# Altium PCB gauntlet1.PcbDoc
Units mil, origin at the board's own origin, x right, y up, seen from the top; angles counter-clockwise.
Board outline 2555 x 1490 mil, 2 copper layers (Top Layer, Bottom Layer); 35 components, 37 nets, 144 pads, 42 vias.
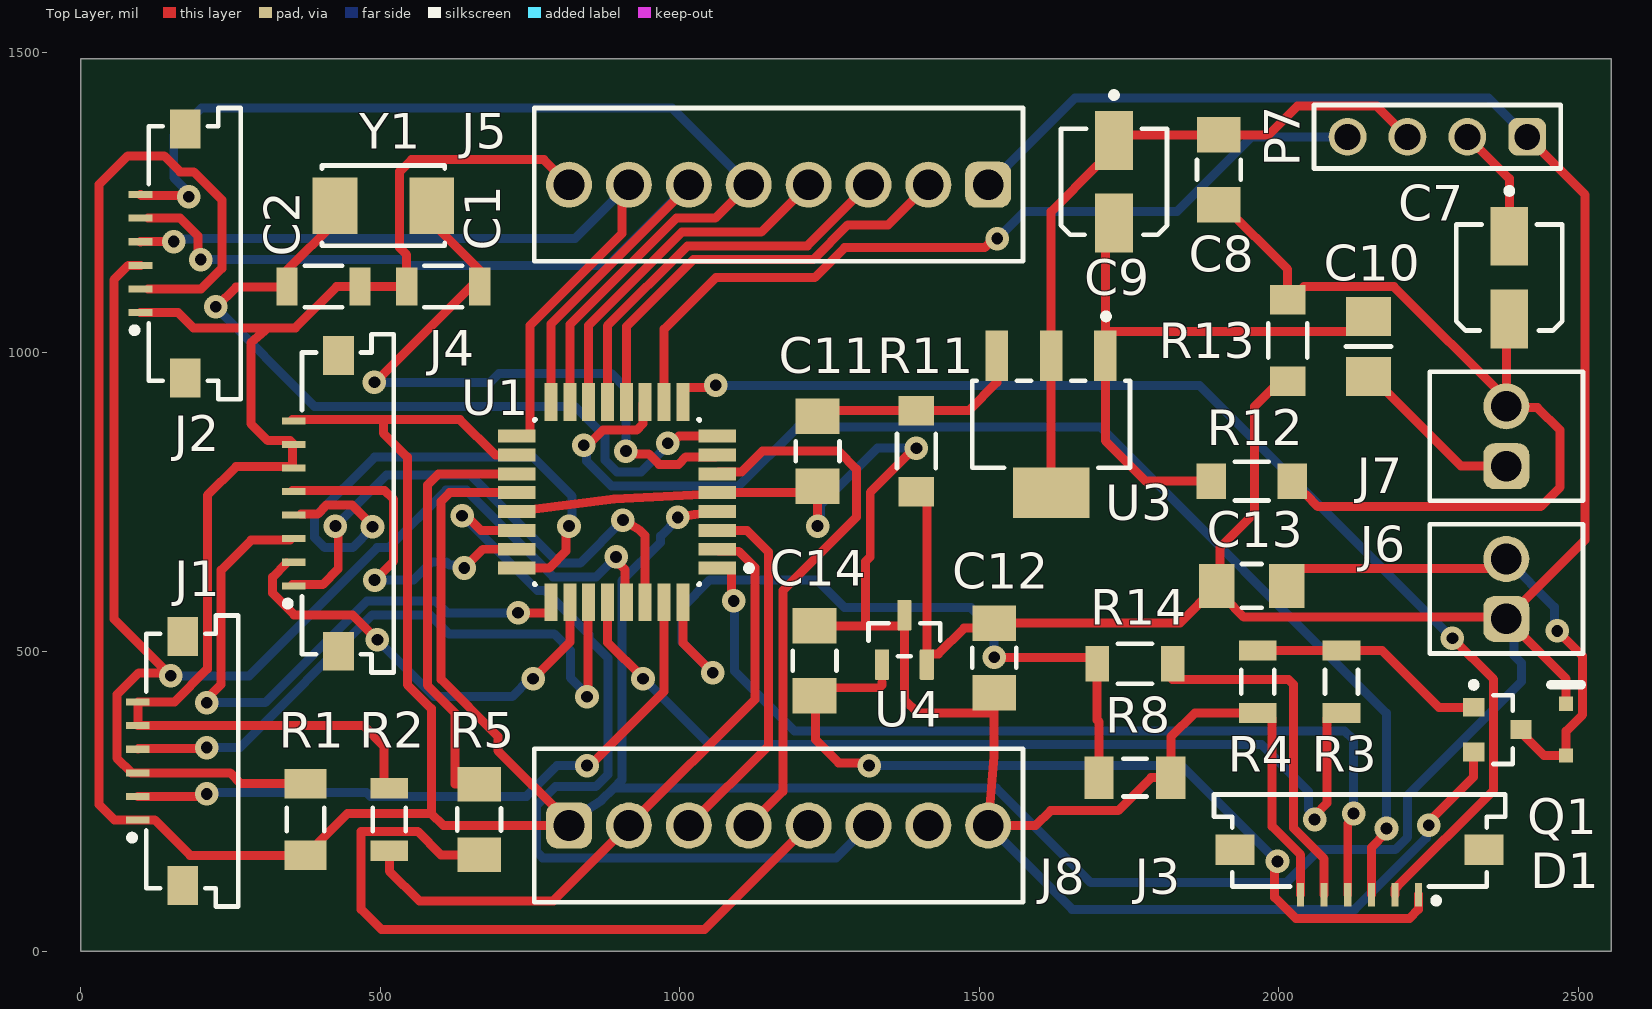
[diagram p0: Top Layer view]
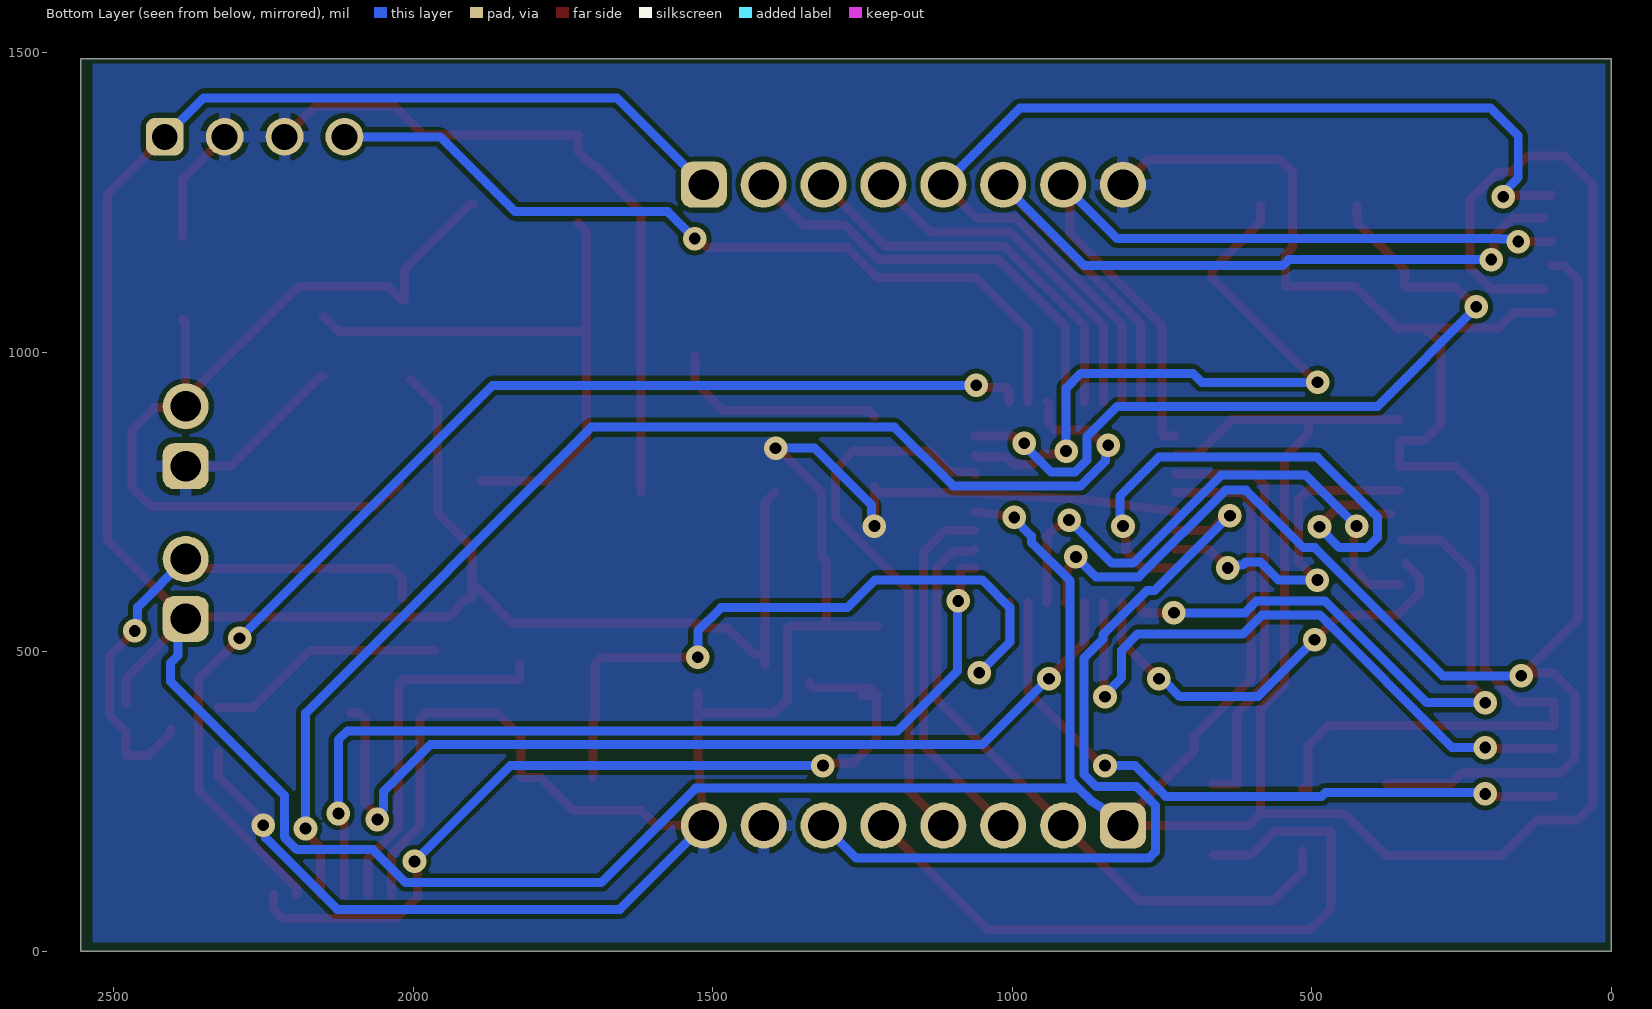
[diagram p1: Bottom Layer view, seen from below]
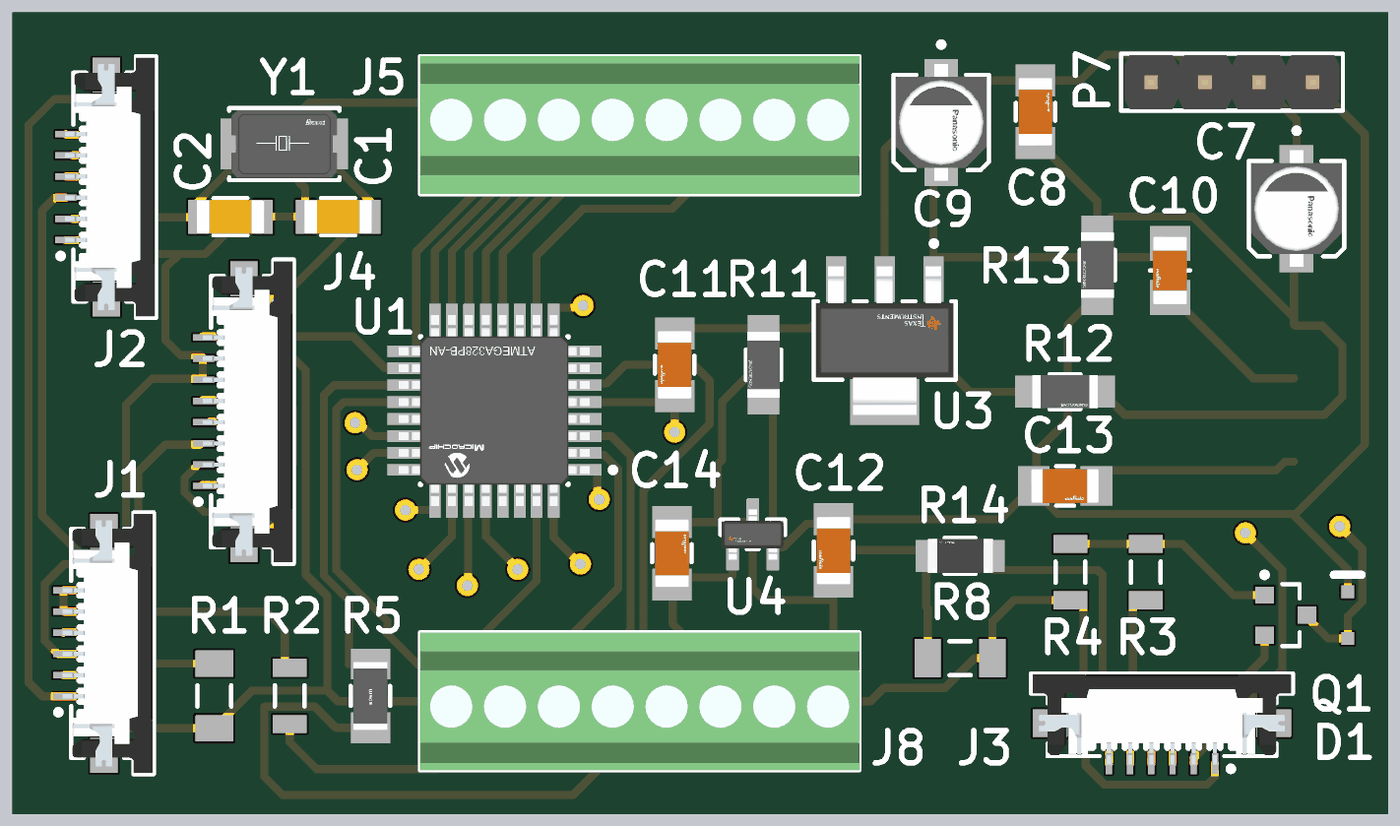
[diagram p2: 3D render of the assembled board from above, using the file's embedded part models]

## Layer stack, top to bottom
Top Solder: solder mask 0.4, Solder Resist, Dk 3.5
Top Layer: signal copper 1.4
Dielectric 1: dielectric 12.6, FR-4, Dk 4.8
Bottom Layer: signal copper 1.4
Bottom Solder: solder mask 0.4, Solder Resist, Dk 3.5

## Board outline
0,0 2555,0 2555,1490 0,1490

## Design rules (kind name [scope] priority, off if disabled: settings)
BoardOutlineClearance [All] p1: gap=7.87 ignorepadtopadclearanceinfootprint=FALSE except(15.75: Arc-SplitBarrior Arc-SplitContinuation Track-SplitBarrior Track-SplitContinuation SMDPad-SplitBarrior SMDPad-SplitContinuation THPad-SplitBarrior THPad-SplitContinuation Via-SplitBarrior Via-SplitContinuation Fill-SplitBarrior Fill-SplitContinuation Poly-SplitBarrior Poly-SplitContinuation Region-SplitBarrior Region-SplitContinuation Text-SplitBarrior Text-SplitContinuation)
Clearance "Clearance Bottom Layer" [OnLayer('Bottom Layer')] p1: gap=8 ignorepadtopadclearanceinfootprint=TRUE except(10: Arc-Text Track-Text SMDPad-Text THPad-Text Via-Text Fill-Text Poly-Text Region-Text Text-Text)
Clearance "Clearance Top Layer" [OnLayer('Top Layer')] p2: gap=8 ignorepadtopadclearanceinfootprint=TRUE except(10: Arc-Text Track-Text SMDPad-Text THPad-Text Via-Text Fill-Text Poly-Text Region-Text Text-Text)
Clearance [All] p3: gap=7.87 ignorepadtopadclearanceinfootprint=FALSE except(3.5: Arc-Arc Arc-Track Arc-SMDPad Track-Track Track-SMDPad SMDPad-SMDPad; 5: Arc-Via Track-Via SMDPad-Via THPad-Via Via-Via; 10: Arc-Text Track-Text SMDPad-Text THPad-Text Via-Text Fill-Text Poly-Text Region-Text Text-Text)
HoleSize [All] p1: absolutevalues=TRUE maxlimit=248.03 minlimit=7.87 maxpercent=80.000 minpercent=20.000
MinimumAnnularRing [All] p1: minimumring=3
MinimumSolderMaskSliver [All] p1: minsoldermaskwidth=3.94
PolygonConnect PolygonConnect_1 [All] p1: thpad.connectstyle=Relief thpad.reliefconductorwidth=20 thpad.reliefentries=4 thpad.polygonreliefangle="90 Angle" thpad.airgapwidth=10 smdpad.connectstyle=Relief smdpad.reliefconductorwidth=20 smdpad.reliefentries=4 smdpad.polygonreliefangle="90 Angle" smdpad.airgapwidth=10 via.connectstyle=Direct via.reliefconductorwidth=20 via.reliefentries=4 via.polygonreliefangle="90 Angle" via.airgapwidth=10
RoutingCorners [All] p1: cornerstyle=Round minsetback=100 maxsetback=100
RoutingVias [All] p1: holewidth=19.68 width=39.37 viastyle="Through Hole" minholewidth=7.87 minwidth=17.72 maxholewidth=39.37 maxwidth=78.74
SilkToSilkClearance [All] p1: silktosilkclearance=3.94
SilkToSolderMaskClearance [IsPad] p1: minsilkscreentomaskgap=3.94 clearancetoexposedcopper=TRUE
SolderMaskExpansion [All] p1: expansion=4 istentingtop=FALSE
Width [All] p1: maxlimit=100 minlimit=3.5 preferedwidth=15
25 further rules are at their usual default settings.

## Components (designator, comment, footprint, x,y, rotation, side; value= is the part's Value field where it differs from the comment)
C1 "22pF" WCAP-CSGP_1206_L3.2W1.6H0.8 605,1110 r180 top
C2 "22pF" WCAP-CSGP_1206_L3.2W1.6H0.8 405,1110 r180 top
C7 "10 uF" FP-FTB-MFG 2385,1125 r270 top
C8 "0.1uF" FP-GRM31M-0_15-IPC_A 1900,1305 r90 top
C9 "10 uF" FP-FTB-MFG 1725,1285 r270 top
C10 "3.3uF" FP-GCG31C-0_3-IPC_B 2150,1010 r270 top
C11 "0.1uF" FP-GRM31M-0_15-IPC_A 1230,835 r270 top
C12 "0.1uF" FP-GRM31M-0_15-IPC_A 1525,490 r270 top
C13 "0.1uF" FP-GRM31M-0_15-IPC_A 1955,610 r0 top
C14 "0.1uF" FP-GRM31M-0_15-IPC_A 1225,485 r90 top
D1 "1N4148WS-E3-08" VISH-SOD-323-2_V 2480,370 r90 top
J1 "Character Select" 686106183422 185.75,317.68 r90 top
J2 "Programming" 686106183422 190,1165 r90 top
J3 "Communications" 686106183422 2135,185 r180 top
J4 "686108183422" 686108183422 445.75,747.95 r90 top
J5 "691210910008" 691210910008 1165,1280 r180 top
J6 "Haptic" 691210910002 -47620,50605 r90 top
J7 "BAT" 691210910002 -47620,50860 r90 top
J8 "" 691210910008 1165,210 r0 top
P7 "NeoPixel Stick" 61300411121 2265,1360 r180 top
Q1 "MMBTA42LT1G" ONSC-SOT-23-3-318-08_V 2365,370 r0 top
R1 "10k" RESC3116X65X40ML10T20 375,220 r90 top
R2 "" RESC3116X65X40LL10T20 515,220 r270 top
R3 "2k" RESC3116X65X40LL10T20 2105,450 r270 top
R4 "2k" RESC3116X65X40LL10T20 1965,450 r90 top
R5 "KTR18EZPJ102" FP-KTR18-IPC_A 665,220 r90 top
R8 "10k" RESC3116X65X40ML10T20 1760,290 r180 top
R11 "0Ω" FP-CR1206-MFG 1395,835 r270 top
R12 "0Ω" FP-CR1206-MFG 1955,785 r0 top
R13 "0Ω" FP-CR1206-MFG 2015,1020 r270 top
R14 "4.7k" FP-RT1206-MFG 1760,480 r180 top value=4.7KΩ
U1 "ATMEGA328PB-AN" FP-C04-074-MFG 895,750 r180 top
U3 "5V Regulator" FP-LM7805MPX-NOPB-MFG 1620,880 r270 top
U4 "3.3V Regulator" FP-DBZ0003A-MFG 1375,520 r90 top
Y1 "Crystal Oscillator" FP-ABM3-MFG 505,1245 r0 top

## Footprints (in the part's own frame and the unit in brackets; to place one, negate y for a bottom-side part, rotate by r counter-clockwise, add the part's x,y. Pads: shape width x height; smd on the part's side, far side on the other; paste and mask are expansions set on the pad)
61300411121 [mm] "Pin Header, pitch 2.54 mm, THT, Vertical, single row, 4p"
  rrect50% 1.6x1.6 hole 1.1: 1(-3.81,0)
  round 1.6 hole 1.1: 2(-1.27,0) 3(1.27,0) 4(3.81,0)
  silkscreen extent -5.23,-1.34 5.23,1.34, body extent -5.08,-1.27 5.08,1.27, height 8.57
686106183422 [mm] "ZIF Connectors, Horizontal, Top Contact Low Profile, pitch 1mm, 6p"
  rect 0.3x1 smd: 1(-2.5,2.3) 2(-1.5,2.3) 3(-0.5,2.3) 4(0.5,2.3) 5(1.5,2.3) 6(2.5,2.3)
  rect 1.65x1.3 smd: M1(-5.275,0.4) M2(5.275,0.4)
  silkscreen extent -6.17,-1.95 6.17,2.67, body extent -6.1,-1.9 6.1,2.35, height 1.28
686108183422 [mm] "ZIF Connectors, Horizontal, Top Contact Low Profile, pitch 1mm, 8p"
  rect 0.3x1 smd: 1(-3.5,2.3) 2(-2.5,2.3) 3(-1.5,2.3) 4(-0.5,2.3) 5(0.5,2.3) 6(1.5,2.3) 7(2.5,2.3) 8(3.5,2.3)
  rect 1.65x1.3 smd: M1(-6.275,0.4) M2(6.275,0.4)
  silkscreen extent -7.18,-1.95 7.18,2.67, body extent -7.1,-1.9 7.1,2.35, height 1.28
691210910002 [mm] "2,54mm - modular - green - Horizontal wire entry - Cage clamp - 0,8mm2 wires - 02p"
  rrect50% 1.95x1.95 hole 1.3: 1(-1271.27,-1270)
  round 1.95 hole 1.3: 2(-1268.73,-1270)
  silkscreen extent -1272.74,-1273.25 -1267.26,-1266.75, body extent -1272.74,-1273.25 -1267.26,-1266.75, height 8.55
691210910008 [mm] "2,54mm - modular - green - Horizontal wire entry - Cage clamp - 0,8mm2 wires - 08p"
  rrect50% 1.95x1.95 hole 1.3: 1(-8.89,0)
  round 1.95 hole 1.3: 2(-6.35,0) 3(-3.81,0) 4(-1.27,0) 5(1.27,0) 6(3.81,0) 7(6.35,0) 8(8.89,0)
  silkscreen extent -10.36,-3.25 10.36,3.25, body extent -10.36,-3.25 10.36,3.25, height 8.55
FP-ABM3-MFG [mm]
  rect 1.9x2.4 smd paste+0 mask+0: 1(-2.05,0) 2(2.05,0)
  silkscreen extent -2.6,-1.7 2.6,1.7, body extent -3.1,-1.8 3.1,1.8, height 0.25
FP-C04-074-MFG [mm]
  rect 1.6x0.55 smd paste+0 mask+0: 1(-4.25,2.8) 2(-4.25,2) 3(-4.25,1.2) 4(-4.25,0.4) 5(-4.25,-0.4) 6(-4.25,-1.2) 7(-4.25,-2) 8(-4.25,-2.8) 17(4.25,-2.8) 18(4.25,-2) 19(4.25,-1.2) 20(4.25,-0.4) 21(4.25,0.4) 22(4.25,1.2) 23(4.25,2) 24(4.25,2.8)
  rect 0.55x1.6 smd paste+0 mask+0: 9(-2.8,-4.25) 10(-2,-4.25) 11(-1.2,-4.25) 12(-0.4,-4.25) 13(0.4,-4.25) 14(1.2,-4.25) 15(2,-4.25) 16(2.8,-4.25) 25(2.8,4.25) 26(2,4.25) 27(1.2,4.25) 28(0.4,4.25) 29(-0.4,4.25) 30(-1.2,4.25) 31(-2,4.25) 32(-2.8,4.25)
  silkscreen extent -5.72,-3.5 3.5,3.5, body extent -5.15,-5.15 5.15,5.15, height 0.25
FP-CR1206-MFG [mm]
  rect 1.25x1.5 smd paste+0 mask+0: 1(-1.725,0) 2(1.725,0)
  silkscreen extent -0.73,-0.82 0.72,0.82, body extent -2.45,-0.92 2.45,0.92, height 0.25
FP-DBZ0003A-MFG [mm]
  rrect17% 1.3x0.6 smd paste+0 mask+0: 1(-1.05,0.95) 2(-1.05,-0.95) 3(1.05,0)
  silkscreen extent -0.7,-1.52 0.7,1.52, body extent -1.8,-1.62 1.8,1.62, height 0.25
FP-FTB-MFG [mm]
  rect 2.5x1.6 smd paste+0 mask+0: 1(-1.75,0) 2(1.75,0)
  silkscreen extent -3.8,-2.25 2.25,2.25, body extent -3.25,-2.5 3.25,2.5, height 0.25
FP-GCG31C-0_3-IPC_B [mil]
  rect 65.08x74.97 smd paste+0 mask+0: 1(-50.22,0) 2(50.22,0)
  silkscreen extent 0,-37 0,37, body extent -93,-47 93,47, height 10
FP-GRM31M-0_15-IPC_A [mil]
  rect 59.28x73.16 smd paste+0 mask+0: 1(-58.12,0) 2(58.12,0)
  silkscreen extent -17,-37 17,37, body extent -107,-56 107,56, height 10
FP-KTR18-IPC_A [mil]
  rect 57.31x73.16 smd paste+0 mask+0: 1(-59.1,0) 2(59.1,0)
  silkscreen extent -19,-37 19,37, body extent -107,-56 107,56, height 10
FP-LM7805MPX-NOPB-MFG [mm]
  rect 2.15x0.95 smd paste+0 mask+0: 1(-2.9,2.3) 2(-2.9,0) 3(-2.9,-2.3)
  rect 2.15x3.25 smd paste+0 mask+0: 4(2.9,0)
  silkscreen extent -4.7,-3.35 1.85,3.35, body extent -4.08,-3.45 4.08,3.45, height 0.25
FP-RT1206-MFG [mm]
  rect 1x1.5 smd paste+0 mask+0: 1(-1.6,0) 2(1.6,0)
  silkscreen extent -0.73,-0.85 0.73,0.85, body extent -2.2,-0.95 2.2,0.95, height 0.25
ONSC-SOT-23-3-318-08_V [mm] "SOT23, 3-Leads, Body 2.92x1.3mm, Pitch 0.95mm"
  rect 0.9x0.8 smd: 1(-1,0.95) 2(-1,-0.95) 3(1,0)
  silkscreen extent -1.12,-1.46 0.65,2.02, body extent -0.65,-1.46 0.65,1.46, height 1.11
RESC3116X65X40LL10T20 [mm] "Chip Resistor, 2-Leads, Body 3.10x1.60mm, IPC High Density"
  rect 0.85x1.6 smd: 1(-1.325,0) 2(1.325,0)
  silkscreen extent -0.5,-0.7 0.5,0.7, body extent -1.6,-0.85 1.6,0.85, height 0.65
RESC3116X65X40ML10T20 [mm] "Chip Resistor, 2-Leads, Body 3.10x1.60mm, IPC Low Density"
  rect 1.25x1.8 smd: 1(-1.525,0) 2(1.525,0)
  silkscreen extent -0.5,-0.8 0.5,0.8, body extent -1.6,-0.85 1.6,0.85, height 0.65
VISH-SOD-323-2_V [mm] "SMD, 2-Leads, Body 1.775x1.3mm"
  rect 0.6x0.6 smd: 1(-1.1,0) 2(1.1,0)
  silkscreen extent 1.9,-0.65 1.9,0.65, body extent -0.89,-0.65 0.89,0.65, height 1.15
WCAP-CSGP_1206_L3.2W1.6H0.8 [mm] "Ceramic Capacitors, body 3.2x1.6mm"
  rect 0.9x1.6 smd: 1(-1.55,0) 2(1.55,0)
  silkscreen extent -0.8,-0.87 0.8,0.87, body extent -1.6,-0.8 1.6,0.8, height 0.8

## Part data
C1 C2: library part CMP-03913-65419648-1, "885012008002 WCAP-CSGP 1206 (3216Metric) Ceramic Capacitor 0.126Lx0.063W 3.20mmx1.60mm C0G NP0 ±5% 22pF", Case Code (Imperial)=1206, Case Code (Metric)=3216, Insulation Resistance=10GΩ, Max Operating Temperature=125°C, Min Operating Temperature=-55°C, Tolerance=5%, Voltage Rating=10V, Capacitance=22pF, Case/Package=1206, Height=800µm, Length=3.2mm, Mount="Surface Mount", NexarPartId=65419648, RoHS=Compliant, Thickness=889µm, Voltage Rating (DC)=10V, Width=1.6mm
C7 C9: library part CMP-05427-000035-1, "CAP ALUM 10UF 20% 50V SMD", Capacitance=10uF, Case/Package=Radial, Dielectric Material=Aluminium, ESR (Equivalent Series Resistance)=2.3R, Leakage Current=5uA, Max Operating Temperature=105°C, Min Operating Temperature=-55°C, Package Quantity=1, Ripple Current=85mA, Tolerance=20%, Voltage=50V, Construction=Cylindrical, Contact Plating=Tin, Diameter=4mm, Height=5.8mm, Height - Seated (Max)=0.24inch, Lead Diameter=0.65mm, Lead Free="Lead Free", Lead Pitch=1mm, Length=5.8mm, Life (Hours)=2000Hour, Mount="Surface Mount", Number of Pins=2, Packaging="Tape and Reel", Radiation Hardening=No, Ripple Current (AC)=85mA, RoHS Compliant=Yes, Series=FT, Termination=SMD/SMT, Voltage Rating=50V, Voltage Rating (DC)=50V
C8 C11 C12 C13 C14: library part CMP-06035-007547-1, "GRM31M1X1H104JA01L / Chip Multilayer Ceramic Capacitors for General Purpose, 1206, 0.10uF, SL, +350/-1000ppm/°C, 5%, 50V", Capacitance=100nF, Case Code (Imperial)=1206, Case Code (Metric)=3216, Dielectric Material=Ceramic, Max Operating Temperature=125°C, Min Operating Temperature=-55°C, Temperature Coefficient=-1000ppm/°C, Tolerance=5%, Voltage=50V, Case/Package=1206, Depth=1.6mm, Dissipation Factor=0.025%, Height=1.15mm, Length=0.126inch, Mount="Surface Mount", Packaging="Tape and Reel", Termination=SMD/SMT, Thickness=0.049inch, Voltage Rating=50V, Voltage Rating (DC)=50V, Width=0.063inch
C10: library part CMP-06035-025559-1, "GCG31CR71E335JA01K / AgPd Termination Conductive Glue Mounting Chip Multilayer Ceramic Capacitors for Automotive 1206 Package, X7R 15% 25V 3.3uF 5%"
D1: library part CMP-2000-05517-2, "Small Signal Fast Switching Diode, 1.2 V, 350 mA, -55 to 150 degC, 2-Pin SOD-323, RoHS, Tape and Reel", Forward Continuous Current=150mA, Forward Voltage Drop=1.2V, Manufacturer=Vishay, Max Surge Current=350mA, Maximum Diode Capacitance=4pF, Maximum Operating Temperature=+150C, Maximum Power Dissipation=200mW, Maximum Reverse Leakage Current=100uA, Minimum Operating Temperature=-55C, Operating Temperature Range=-55Cto+150C, Package / Case=SOD-323, Package Description="2-Pin Surface Mount Device, Body 1.775 x 1.3 mm, Height 1.15 mm", Package Reference=SOD-323-2, Package Version="Rev. 5, 09/2009", Peak Reverse Voltage=100V, Brand=VishaySemiconductors, Datasheet URL=http://www.vishay.com/docs/85751/1n4148ws.pdf, Datasheet Version="Rev. 2.0, 05/2013", Factory Pack Quantity=3000, Manufacturer URL=http://www.vishay.com/, Mounting Style=SMD/SMT, Mounting Technology=SurfaceMount, Package URL=http://www.st.com/st-web-ui/static/active/en/resource/technical/document/datasheet/CD00233088.pdf, Packaging=Reel, Product=SwitchingDiodes, Product Category=Diodes-GeneralPurpose,Power,Switching, Recovery Time=4ns, RoHS=Details, Series=1N4148WS, Unit Weight=0.000152oz
J1 J2 J3: library part CMP-1502-01493-2, "686106183422", Contact Resistance=30mΩ, Current Rating=800mA, Insulation Resistance=100MΩ, Max Operating Temperature=85°C, Min Operating Temperature=-25°C, Operating Supply Voltage=50V, Contact Plating=Tin, Gender=Receptacle, Lead Pitch=1mm, Length=7.1mm, NexarPartId=81848301, Number of Pins=6, Orientation=Horizontal, Packaging="Tape and Reel", Pitch=1mm, RoHS=Compliant
J4: library part CMP-1502-01494-2, Contact Resistance=30mΩ, Current Rating=800mA, Insulation Resistance=100MΩ, Max Operating Temperature=85°C, Min Operating Temperature=-25°C, Operating Supply Voltage=50V, Contact Plating=Tin, Gender=Receptacle, Lead Pitch=1mm, Length=9.1mm, NexarPartId=81848304, Number of Pins=8, Orientation=Horizontal, Packaging="Tape and Reel", Pitch=1mm, RoHS=Compliant
J5: library part CMP-1502-02461-2, NexarPartId=105950654
J6 J7: library part CMP-1502-02456-2, "691210910002", Current Rating=6A, Max Operating Temperature=105°C, Min Operating Temperature=-40°C, Voltage Rating=150V, Contact Material=Tin, Height=8.7mm, NexarPartId=105950649, Number of Contacts=2, Number of Rows=1
J8: library part CMP-1502-02461-2, "691210910008", NexarPartId=105950654
P7: library part CMP-1502-01064-2, "61300411121", Color=Black, Contact Resistance=20mΩ, Current Rating=3A, Max Operating Temperature=105°C, Min Operating Temperature=-40°C, Operating Supply Voltage=250V, Connector Type="Male Pin", Contact Material=Copper, Contact Mating Length=5.9944mm, Contact Plating=Gold, Gender=Male, Height=8.89mm, Lead Free="Lead Free", Lead Pitch=2.54mm, Mount="Through Hole", NexarPartId=32855522, Number of Contacts=4, Number of Pins=4, Number of Positions=4, Number of Rows=1, Orientation=Vertical, Packaging=Bulk, Pitch=2.54mm, REACH SVHC=Unknown, RoHS=Compliant, Termination=Solder, Voltage Rating=250V
Q1: library part CMP-1048-00662-1, "High Voltage Transistor, NPN Silicon, 3-Pin SOT-23, Pb-Free, Tape and Reel", Manufacturer="On Semiconductor", ComponentLink1Description="Manufacturer URL", ComponentLink1URL=http://www.onsemi.com/, ComponentLink2Description=Datasheet, ComponentLink2URL=http://www.onsemi.cn/pub_link/Collateral/MMBTA42LT1-D.PDF, ComponentLink3Description="Package Specification", ComponentLink3URL=http://www.onsemi.cn/pub_link/Collateral/318-08.PDF, DatasheetVersion="Rev. 12", fT Min (MHz)=50, IC Continuous (A)=0.5, Mounting Technology="Surface Mount", PackageDescription="3-Pin Small Outline Transistor, Body 2.92 x 1.3 mm, Pitch 0.95 mm", PackageReference=SOT-23-3-318-08, PackageVersion="Rev. AP, 11/2009", Packing="Tape and Reel", PartNumber=MMBTA42LT1G, Polarity=NPN, RoHS=TRUE
R1: library part CMP-1014-00623-2, "Chip Resistor, 10 KOhm, +/- 1%, 0.25 W, -55 to 155 degC, 1206 (3216 Metric), RoHS, Tape and Reel", Case Code (Imperial)=1206, Case Code (Metric)=3216, Manufacturer=Yageo, Max Operating Temperature=155degC, Min Operating Temperature=-55degC, Package Description="2-Pin Surface Mount Device, Body 3.1 x 1.6 mm", Package Quantity=5000, Package Reference=1206.0, Power Rating=250mW, Resistance=10KOhm, Temperature Coefficient=100ppm/degreesC, Tolerance=1%, Voltage Rating=200V, Case/Package=1206, Composition=ThickFilm, Datasheet URL=http://www.yageo.com/NewPortal/yageodocoutput?fileName=/pdf/R-Chip/PYu-RC_Group_51_RoHS_L_5.pdf, Datasheet Version="Rev. 5, 10/2016", Depth=1.6mm, Height=0.55mm, Lead Free=LeadFree, Length=3.1mm, Manufacturer URL=http://www.yageo.com/, Military Standard=Not, Packaging=TapeandReel, REACH SVHC=Unknown, RoHSCompliant=true, Termination=SMD/SMT, Width=1.6mm
R2: library part CMP-2003-04017-1, "RC1206JR-10220RL", Manufacturer=Yageo, Part Number=RC1206JR-10220RL
R3 R4: library part CMP-2003-04099-1, "RT1206BRD072KL", Manufacturer=Yageo, Part Number=RT1206BRD072KL
R5: library part CMP-08839-031408-1, "Res Thick Film 1206 1kΩ 5% 0.1W ±200ppm/°C Automotive Paper T/R", Case Code (Imperial)=1206, Case Code (Metric)=3216, Max Operating Temperature=155°C, Max Power Dissipation=250mW, Min Operating Temperature=-55°C, Package Quantity=1, Resistance=1kR, Resistor Type="Thick Film", Temperature Coefficient=200ppm/°C, Tolerance=5%, Case/Package=1206, Features="Automotive AEC-Q200", Height=0.026inch, Lead Free="Lead Free", Length=0.126inch, Mount="Surface Mount", Number of Terminations=2, Packaging="Tape and Reel", Power Rating=250mW, RoHS Compliant=Yes, Series=KTR, Size Code=1206, Width=0.063inch
R8: library part CMP-2003-04020-1, Manufacturer=Yageo, Part Number=RC1206JR-1310KL
R11 R12 R13: library part CMP-2000-06118-2, "CR1206-J/-000ELF / Thick Film Chip Resistors 1206 0Ω 0.25W 5%", Case Code (Imperial)=1206, Case Code (Metric)=3216, Max Operating Temperature=155°C, Max Power Dissipation=250mW, Min Operating Temperature=-55°C, Package Quantity=5000, Resistance=0mR, Temperature Coefficient=500ppm/°C, Tolerance=5%, Voltage Rating=200V, Case/Package=1206, Composition="Thick Film", Contact Plating=Tin, Depth=1.6mm, Height=0.6mm, Length=3.2mm, Military Standard=Not, Mount="Surface Mount", Number of Pins=2, Packaging="Tape and Reel", Power Rating=250mW, Radiation Hardening=No, REACH SVHC="No SVHC", Termination=SMD/SMT, Thickness=610um, Voltage Rating (DC)=200V, Width=1.6mm
R14: library part CMP-2003-04165-2, "RT1206BRD074K7L / RES SMD 4.7K OHM 0.1% 1/4W 1206", Manufacturer=Yageo, Manufacturer Part Number=RT1206BRD074K7L, Package=RT1206, Power Rating=0.25W, Resistance=4.7KΩ, Temperature="-55°C to +155°C", Temperature Coefficient="25 ppm/°C", Temperature Range High=+155°C, Temperature Range Low=-55°C, Tolerance=0.005, Voltage Rating=200V, Automotive=No, Category=Res, ComponentLink2Description=Datasheet, ComponentLink2URL=http://www.yageo.com/documents/recent/PYu-RT_1-to-0.01_RoHS_L_9.pdf, Composition="Thin Film", Device Class L1="Passive Components", Device Class L2=Resistors, Device Class L3="Chip SMD Resistors", Digikey Description="RES SMD 4.7K OHM 0.1% 1/4W 1206", Footprint Url=http://www.yageo.com/exep/pages/download/literatures/PYu-R_Mount_10.pdf, Height=0.65mm, Ipc Land Pattern Name=RESC310160X55, Lead Free=Yes, Mouser Description="Res Thin Film 1206 4.7K Ohm 0.1% 0.25W(1/4W) ±25ppm/C Epoxy Pad SMD T/R", Octopart=https://octopart.com/rt1206brd074k7l-yageo-1170071, RoHS=TRUE, Series=RT
U1: library part CMP-06276-000029-1, "IC MCU 8BIT 32KB FLASH 32TQFP", Frequency=20MHz, Manufacturer=Microchip, Max Supply Voltage=5.5V, Min Supply Voltage=1.8V, Nominal Supply Current=0.06-5.2mA, Package=C04-074, Temperature="-40°C to +105°C", Temperature Range High=+105°C, Temperature Range Low=-40°C, Automotive=No, Category=IC, ComponentLink2Description=Datasheet, ComponentLink2URL=http://www.microchip.com/mymicrochip/filehandler.aspx?ddocname=en589665, Core Architecture=AVR, Data Bus Width=8bits, Device Class L1="Integrated Circuits (ICs)", Device Class L2="Embedded Processors and Controllers", Device Class L3=Microcontrollers, Digikey Description="IC MCU 8BIT 32KB FLASH 32TQFP", Footprint Url=https://ww1.microchip.com/downloads/en/DeviceDoc/32L_TQFP_7x7_PT_C04-0074B.pdf, Height=1.2mm, Interface=I2C,SPI,USART,2-Wire, Ipc Land Pattern Name=QFP80P900X900X120-32, Lead Free=Yes, Manufacturer Part Number=ATMEGA328PB-AN, Memory Size=32KBytes, Memory Type=FLASH, Mouser Description="AVR 32KBytes Flash, 1KBytes EEPROM, 2KBytes RAM, w - 20MHZ, TQFP, Extended TEMP, GREEN 5 V", Number Of A/D Converters=1, Number Of Adc Channels=8, Number Of Cores=1, Number Of I2C Channels=2, Number Of I/Os=27, Number Of Pwm Channels=10, Number Of Spi Channels=2, Number Of Timers/Counters=5, Number Of Uart Channels=2, Octopart=https://octopart.com/atmega328pb-an-microchip-77760226, Ram Size=2KBytes, RoHS=TRUE, Standoff Height=0.05mm
U3: library part CMP-04917-000022-1, "IC REG LINEAR 5V 1.5A SOT223-4 / LM7805", Dropout Voltage=2V, Manufacturer="Texas Instruments", Manufacturer Part Number=LM7805MPX/NOPB, Max Junction Temp=+150°C, Max Supply Voltage=30V, Min Supply Voltage=7.5V, Nominal Supply Current=8mA, Output Current=1.5A, Output Voltage=5V, Package=SOT223-4, Temperature="0°C to +125°C", Temperature Range High=+125°C, Temperature Range Low=0°C, Accuracy Percentage=3%, Automotive=No, Category=IC, ComponentLink2Description=Datasheet, ComponentLink2URL=http://www.ti.com/lit/ds/symlink/lm7800.pdf, Device Class L1="Integrated Circuits (ICs)", Device Class L2="Power Management ICs", Device Class L3="Voltage Regulators - Linear", Digikey Description="IC REG LINEAR 5V 1.5A SOT223-4", Height=1.8mm, Lead Free=Yes, Number Of Outputs=1, Octopart=https://octopart.com/lm7805mpx%2Fnopb-texas+instruments-74629992, Output Type=Fixed, RoHS=TRUE, Standoff Height=0.02mm
U4: library part CMP-04917-000020-1, "TLV76033DBZR / IC REG LINEAR 3.3V 100MA SOT23-3", Dropout Voltage=0.9V, Manufacturer="Texas Instruments", Manufacturer Part Number=TLV76033DBZR, Max Junction Temp=+125°C, Max Supply Voltage=30V, Min Supply Voltage=4.2V, Output Current=100mA, Output Voltage=3.3V, Package=DBZ0003A, Temperature="-40°C to +125°C", Temperature Range Low=-40°C, Accuracy Percentage=4%, Automotive=No, Category=IC, ComponentLink2Description=Datasheet, ComponentLink2URL=http://www.ti.com/lit/ds/symlink/tlv760.pdf, Device Class L1="Integrated Circuits (ICs)", Device Class L2="Power Management ICs", Device Class L3="Voltage Regulators - Linear", Digikey Description="IC REG LINEAR 3.3V 100MA SOT23-3", Height=1.12mm, Lead Free=Yes, Mouser Description="100-mA, 30-V wide-VIN, fixed-output linear voltage regulator 3-SOT-23 -40 to 125", Number Of Outputs=1, Octopart=https://octopart.com/tlv76033dbzr-texas+instruments-84352145, Output Type=Fixed, RoHS=TRUE, Standoff Height=0.01mm, Temperature Range High=+125°C
Y1: library part CMP-27762-004490-1, "ABM3-16.000MHZ-D2Y-T / Crystal 16MHz ±20ppm 18pF SMD-2 5mm x 3.2mm", Case/Package=SMD/SMT, ESR (Equivalent Series Resistance)=40R, Frequency=16MHz, Frequency Stability=30ppm, Frequency Tolerance=20ppm, Load Capacitance=18pF, Max Operating Temperature=85°C, Min Operating Temperature=-40°C, Operating Frequency="16 MHz", Package Quantity=1000, Resistor Type=Ceramic, Height=0.051inch, Lead Free="Lead Free", Length=0.197inch, Mount="Surface Mount", Number of Pins=2, Packaging="Tape and Reel", RoHS Compliant=Yes, Series=ABM3, Series Resistance=40R, Termination=SMD/SMT, Tolerance=20ppm, Width=0.126inch

## Via types
v1: diameter 39.37, hole 19.68, Top Layer to Bottom Layer, 42 vias

## Nets (pads, with @x,y where several pads share a name; then routed paths per layer and width w, separated by ;. In a path a pad name is that pad's centre, name@x,y a point inside that pad or via, vN(x,y) a via of type N, cw(c..) or ccw(c..) an arc to the next point about the centre after c; other vN are vias at no path point)
Arrow: J8.2 R2.2 U1.2 | length 1100.3
  Top Layer w15: R2.2 515,134 565,84 789,84 J8.2 1125.19,420.19 1125.19,641.14 1098.4,667.93 1065.65,667.93 U1.2
BAT: C7.2 C8.1 J7.2 R12.2 R13.1 | length 1493.5
  Top Layer w15: C8.1 1906.94,1246.88 2015,1138.82 R13.1 2019.92,1087.91 2042.01,1110 2192.16,1110 J7.2@2380,922.16 ; R12.2 2022.91,780.08 2040.02,762.97 2044.94,762.97 2065.56,742.36 2437.36,742.36 2470,775 2470,870 2432.1,907.9 2382.1,907.9 J7.2 J7.2@2380,922.16 ; C7.2 2380,1051.1 J7.2@2380,922.16
Character_Select: J1.4 U1.27 | length 1087.3
  Top Layer w15: J1.4 96.51,338.68 208.68,338.68 v1(210,340) ; v1(845,425) 846.38,426.38 846.38,581.3 U1.27
  Bottom Layer w15: v1(210,340) 265.24,340 486.79,561.55 582.67,561.55 614.22,530 790,530 817.37,502.63 817.37,457.03 845,429.39 v1(845,425)
Crystal_1: C1.1 U1.7 Y1.2 | length 1111.5
  Top Layer w15: v1(490,950) 491.45,950 666.02,1124.57 666.02,1137 585.71,1217.32 Y1.2 ; v1(910,835.14) 914.66,830.48 948.13,830.48 965.43,813.19 997.94,813.19 1010.17,825.41 1059,825.41 U1.7
  Bottom Layer w15: v1(490,950) 683.46,950 698.46,965 885.33,965 910,940.33 v1(910,835.14)
Crystal_2: C2.2 U1.8 Y1.1 | length 1303.5
  Top Layer w15: v1(225,1076.19) 226.18,1076.19 259,1109 342.98,1109 C2.2 343.98,1137 424.29,1217.32 Y1.1 ; v1(980,848.37) 986.59,848.37 998.46,860.24 U1.8
  Bottom Layer w15: v1(225,1076.19) 225,1075 390,910 824.39,910 874.81,859.57 874.81,820.57 895.43,799.96 934.96,799.96 980,845 v1(980,848.37)
Game_Start: J3.3 U1.11 | length 2085.3
  Top Layer w15: v1(839.63,845) 846.22,845 871.55,870.33 928,870.33 938.92,881.25 938.92,914 U1.11 ; J3.3 2154.68,173.09 2180,198.41 v1(2180,205)
  Bottom Layer w15: v1(839.63,845) 844.29,840.34 844.29,818.56 885.9,776.96 1098.62,776.96 1196.85,875.19 1702.52,875.19 2180,397.7 v1(2180,205)
GND: C1.2 C2.1 C7.1 C8.2 C9.1 C10.2 C11.2 C12.2 C14.2 J1.5 J1.6 J2.1 J3.6 J4.6 J4.7 J5.8 J7.1 J8.7 J8.8 P7.2 P7.3 Q1.2 R2.1 R4.1 R8.1 U1.5 U1.21 U3.2 U3.4 U4.3 | length 7792.9
  Top Layer w15: J2.1 162.22,1066.57 187.8,1041 312,1041 ; R2.1 506,272.17 506,342.73 472,376.73 J1.5 J1.6 155.86,416.1 211.09,471.33 211.09,761.09 259.06,809.06 333.43,809.06 353.43,809.06 353.43,848.43 349.12,852.74 312.26,852.74 283.94,881.06 283.94,1009.64 283.94,1015.81 289.06,1020.93 312,1041 ; U1.21 751.67,737.58 890.43,755.19 1038.33,762.42 U1.5 1218.87,765.75 C11.2 v1(1230,710) ; J5.8 773,1322 552,1322 532,1302 532,1174.98 543.98,1163 C1.2 C2.1 427,1110 358,1041 312,1041 ; C14.2 1310,543.12 ; v1(1395,840) 1391.86,840 1318,766.14 1318,658.63 1310,650.63 1310,543.12 ; C12.2 1525,398 ; U3.4 U3.2 1620,1235 1697.19,1312.19 1701,1312.19 1725,1336.18 C9.1 ; C9.1@1725,1363.12 C8.2 1983.12,1363.12 2031,1411 2164,1411 P7.3 ; J3.6 2036.57,161.14 1989,208.72 1989,388.6 1979.76,397.83 R4.1 1859.87,397.83 1820.04,358 R8.1 1787,290 1732,235 1619,235 1594,210 J8.8 1525,325 1525,398 ; C10.2 2154.94,959.78 2304.72,810 J7.1 ; v1(2250.71,210.47) 2250.71,216.12 2325.63,291.04 Q1.2 ; P7.2 2385,1290 C7.1 ; 1310,543.12 1370.69,543.12 1375,538.81 1375,420 1397,398 1525,398
  Bottom Layer w15: v1(1230,710) 1234.66,714.66 1234.66,744.66 1330,840 v1(1395,840) ; J8.8 1655,70 2127.29,70 2246.52,189.24 2246.52,206.28 v1(2250.71,210.47)
Haptic: R3.2 U1.28 | length 1597.6
  Top Layer w15: U1.28 879.25,515.93 938.55,456.63 v1(938.55,455) ; v1(2060,220) 2060,226.59 2081,247.6 2081,388.6 2090.24,397.83 R3.2
  Bottom Layer w15: v1(938.55,455) 940.19,455 1050,345.19 1971.39,345.19 2050,266.58 2050,236.59 2060,226.59 v1(2060,220)
Haptic_L: C13.2 D1.1 J6.2 Q1.3 | length 896
  Top Layer w15: C13.2@2018.12,590 2018.12,621.94 2035.26,639.08 2347.36,639.08 2363.28,655 J6.2 ; Q1.3 2404.37,365.7 2443.38,326.69 D1.1 2480,367.77 2507.31,395.08 2507.31,492.69 v1(2465,535)
  Bottom Layer w15: J6.2 2460.34,574.66 2460.34,539.66 v1(2465,535)
IR_Comms: J3.2 U1.9 | length 2008.9
  Top Layer w15: U1.9 1005.24,937.99 1008.56,941.32 1056.32,941.32 v1(1060,945) ; J3.2 2194.05,105.04 2197.24,108.23 2198.23,108.23 2358.85,268.85 2358.85,453.89 v1(2290,522.74)
  Bottom Layer w15: v1(1060,945) 1867.74,945 v1(2290,522.74)
LoRa_Rx: J3.4 U1.1 | length 1539.7
  Top Layer w15: U1.1 1082.99,639.76 1086.32,636.44 1086.32,588.68 v1(1090,585) ; J3.4 2115.31,213.72 2125.05,223.46 v1(2125.05,230.05)
  Bottom Layer w15: v1(1090,585) 1091.48,583.52 1091.48,467.91 1191.21,368.19 2109.7,368.19 2125.05,352.84 v1(2125.05,230.05)
LoRa_Tx: R8.2 R14.2 U1.32 | length 1255.7
  Top Layer w15: U1.32 1005.24,514.76 v1(1055,465) ; v1(1525,490.79) 1686.21,490.79 R14.2 1697.01,385.95 1699.96,383 R8.2
  Bottom Layer w15: v1(1055,465) 1004,516 1004,574 1050.19,620.19 1229.06,620.19 1275.24,574 1486,574 1525,535 v1(1525,490.79)
Magic_Activate: J4.1 U1.30 | length 923.8
  Top Layer w15: J4.1@353.43,612.2 403.41,612.2 429.66,638.46 429.66,705.34 v1(425,710) ; v1(905,720) 933.46,702.82 942.24,694.03 U1.30
  Bottom Layer w15: v1(425,710) 510,795 651.06,795 798.06,648 833.48,648 905,719.52 v1(905,720)
Magic_Read_1: J4.5 U1.23 | length 589.8
  Top Layer w15: J4.5@353.43,769.69 506.87,769.69 522,754.56 522,651.46 v1(490.27,619.73) ; v1(640,640) 671.26,671.26 U1.23
  Bottom Layer w15: v1(490.27,619.73) 555.19,619.73 585.46,650 609.92,650 615.26,644.66 635.34,644.66 v1(640,640)
Magic_Read_2: J4.4 U1.24 | length 984.3
  Top Layer w15: J4.4@367.38,729.86 395.1,729.86 410.43,745.19 452.57,745.19 486.81,710.94 v1(486.81,709) ; U1.24 781.67,639.76 810.34,668.43 810.34,705.34 v1(815,710)
  Bottom Layer w15: v1(486.81,709) 486.81,707.06 453.57,673.81 407.19,673.81 389.81,691.19 389.81,724.57 490.24,825 755,825 820.31,759.69 820.31,744.69 819.66,744.03 819.66,714.66 v1(815,710)
Magic_Read_3: J4.3 U1.25 | length 1035.9
  Top Layer w15: v1(210,415) 210,421.59 234.09,445.69 234.09,636.62 284.11,686.63 J4.3@349.12,686.63 ; v1(730,565.19) 781.44,565.19 784.76,568.51 U1.25
  Bottom Layer w15: v1(210,415) 307.71,415 477.26,584.55 592.2,584.55 611.56,565.19 v1(730,565.19)
Magic_Read_4: J4.2 U1.26 | length 731.4
  Top Layer w15: J4.2@343.01,647.93 320.01,624.93 320.01,597.83 355.97,561.87 453.13,561.87 v1(495,520) ; v1(755,455) 816.26,516.26 U1.26
  Bottom Layer w15: v1(495,520) 589.61,425.39 719.96,425.39 749.57,455 v1(755,455)
MISO_0: J2.5 J5.6 U1.16 | length 1470.4
  Top Layer w15: J2.5@111.63,1224.06 165.7,1224.06 195.34,1194.42 195.34,1159.66 v1(200,1155) ; U1.16 784.76,1047.24 1015,1277.47 J5.6
  Bottom Layer w15: v1(200,1155) 538.3,1155 548.3,1145 880,1145 J5.6
MOSI_0: J2.6 J5.5 U1.15 | length 1750.9
  Top Layer w15: J2.6 101.04,1261.83 178.17,1261.83 v1(180,1260) ; U1.15 816.26,1046.21 994.05,1224 1059,1224 J5.5
  Bottom Layer w15: v1(180,1260) 180,1266.59 155,1291.59 155,1362 201,1408 987,1408 J5.5
MP3_1: R5.2 U1.19 | length 715.7
  Top Layer w15: R5.2 625,279.1 625,397.67 578.33,444.34 578.33,778.33 597.24,797.24 U1.19
MP3_2: J8.6 U1.22 | length 1440.7
  Top Layer w15: v1(636.51,727.26) 643.11,727.26 667.61,702.76 U1.22
  Bottom Layer w15: v1(636.51,727.26) 637.5,727.26 762.76,602 775.29,602 848.19,529.1 848.19,521.57 880.19,489.57 880.19,295.43 859.57,274.81 792.37,274.81 761,243.45 761,166 771,156 1261,156 J8.6
Neo_Lights: P7.4 U1.10 | length 1395.7
  Top Layer w15: U1.10 973.74,1038.74 1060,1125 1225.05,1125 1275.05,1175 1509.03,1175 1524.03,1190 v1(1530,1190)
  Bottom Layer w15: v1(1530,1190) 1575,1235 1830,1235 1955,1360 P7.4
NetC9_2: C9.2 C10.1 R12.1 U3.1 | length 1024
  Top Layer w15: C9.2 1710.55,1201.65 U3.1@1710.55,1035 ; R12.1 1778,785 1710.55,852.45 U3.1 U3.1@1710.55,1035 ; C10.1 2124.96,1035.17 2111.4,1035.17 2111.23,1035 U3.1@1710.55,1035
NetC11_1: C11.1 R11.1 U3.3 | length 367.2
  Top Layer w15: C11.1 1239.79,902.91 1482.36,902.91 1529.45,950 U3.3
NetJ3_5: J3.5 R14.1 | length 603.4
  Top Layer w15: R14.1 1822.99,454 2016.03,454 2024.81,445.21 2024.81,205.43 2075.94,154.3 J3.5
NetJ8_5: J8.5 R5.1 | length 1176.4
  Top Layer w15: R5.1 601.17,160.9 562,200.07 468,200.07 468,70 502,36 1041,36 J8.5
NetQ1_1: Q1.1 R3.1 R4.2 | length 399.9
  Top Layer w15: R4.2 R3.1 2172.83,502.17 2267.6,407.4 Q1.1
On_Light: J1.2 U1.31 | length 1105.3
  Top Layer w15: J1.2 205.81,258.62 v1(210,262.81) ; v1(845,310) 849.94,310 973.74,433.8 U1.31
  Bottom Layer w15: v1(210,262.81) 212.19,265 476.93,265 483.31,258.62 743.65,258.62 790.63,305.61 795.02,310 v1(845,310)
RESET: J1.3 J2.3 R1.2 U1.29 | length 2322.2
  Top Layer w15: J2.3 79.32,1145.32 55,1121 55,555 v1(150,460) ; v1@145,465 96.58,465 60.01,428.43 60.01,322.59 84.61,297.99 249.19,297.99 267.14,280.04 R1.2 ; v1(893.65,658.41) 893.65,651.81 908.79,636.67 908.79,584.64 U1.29
  Bottom Layer w15: v1(150,460) 280.78,460 494.59,673.81 513.57,673.81 609.76,770 643.53,770 788.53,625 860.24,625 v1(893.65,658.41)
SCK_0: J2.4 J5.7 U1.17 | length 1363.5
  Top Layer w15: J2.4 99.61,1184.84 154.84,1184.84 v1(155,1185) ; U1.17 746.67,860.24 750,863.56 750,1045 903.18,1198.18 903.18,1268.18 J5.7
  Bottom Layer w15: v1(155,1185) 159.66,1189.66 184.9,1189.66 185.43,1190.19 825.19,1190.19 J5.7
SCL_Accelerometer_Sword: J8.4 U1.6 | length 930.3
  Top Layer w15: U1.6 1065.42,800.34 1103.37,800.34 1138.03,835 1265,835 1295,805 1295,725 1172,602 1172,267 J8.4
SDA_Accelerometer_Sword: J8.3 U1.3 | length 612.6
  Top Layer w15: J8.3 1148.19,343.19 1148.19,666.57 1112,702.76 U1.3
TFT_CS: J5.4 U1.14 | length 592.4
  Top Layer w15: U1.14 847.76,1045.18 1003.58,1201 1136,1201 J5.4
TFT_DC: J5.3 U1.13 | length 660.3
  Top Layer w15: U1.13 879.25,1044.14 1013.11,1178 1213,1178 J5.3
TFT_RES: J5.2 U1.12 | length 728.2
  Top Layer w15: U1.12 910.75,1043.11 1022.63,1155 1222.53,1155 1280.53,1213 1348,1213 J5.2
VCC: C12.1 C13.1 D1.2 J1.1 J2.2 J4.8 J5.1 J6.1 J8.1 P7.1 R1.1 R11.2 R13.2 U1.4 U1.18 U1.20 U4.2 | length 10601.4
  Top Layer w15: J2.2@111.63,1105.95 200.71,1105.95 235.19,1140.43 235.19,1254.57 188.38,1301.38 165.56,1301.38 138.75,1328.19 78.19,1328.19 30,1280 30,245.25 56,219.25 J1.1 123,219.25 182.29,159.96 R1.1 445.04,230 585,230 ; J4.8@353.43,887.8 505,887.8 ; U1.20 615.75,765.75 601.33,751.33 601.33,453.87 696.33,358.87 696.33,334.93 815,216.26 J8.1 605,210 585,230 ; U1.18 692,828.74 632.94,887.8 505,887.8 ; v1(996.41,724.38) 1024.41,729.08 1038.33,730.93 U1.4 ; R11.2 1395.3,767.09 1412.4,749.98 U4.2 ; U4.2@1413.14,477.93 1413.14,492.93 1416.71,496.5 1431.71,496.5 1474.71,539.5 1516.38,539.5 C12.1 1835,548.12 C13.1 ; R13.2@2005,955 1960,910 1960,732 1901.88,673.88 1901.88,590 1909.94,590 1942.02,557.92 2377.08,557.92 J6.1 ; P7.1 2511.82,1263.18 2511.82,686.82 J6.1 ; D1.2 2480,455 J6.1 ; 505,887.8 505,865 545,825 545,445.15 585,405.15 585,230
  Bottom Layer w15: J8.1 834.19,229.19 869.1,251.81 889.78,272.49 ; v1(996.41,724.38) 996.41,722.01 967.76,693.37 967.76,682.76 903.37,618.37 903.37,286.08 889.78,272.49 ; J5.1 1660,1425 2350,1425 P7.1 ; J6.1 2392.68,542.32 2392.68,494.11 2405.19,481.61 2405.19,450.19 2215.19,260.19 2215.19,190.43 2194.57,169.81 2067.53,169.81 2012.53,114.81 1686.39,114.81 1528.71,272.49 889.78,272.49
VCC_3.3V: C14.1 J3.1 U4.1 | length 1427.9
  Top Layer w15: C14.1@1252,426.88 C14.1 ; v1(1316,310) 1311.34,314.66 1265.34,314.66 1226.26,353.74 1226.26,425.62 C14.1 ; 1337.6,448.66 1337.6,444.31 1333.29,440 1238.12,440 C14.1 ; v1(1997.95,150) 1993.4,145.44 1993.4,90.11 2028.51,55 2218.43,55 2233.43,70 J3.1
  Bottom Layer w15: v1(1316,310) 1837.95,310 v1(1997.95,150)
pads on no net: J1.M1 J1.M2 J2.M1 J2.M2 J3.M1 J3.M2 J4.M1 J4.M2

## Polygon pours and split planes (outlines as drawn)
GND on Bottom Layer "GND_L02_P000" (solid, pour order 0): 10,1485 10,15 2535,15 2535,1485